# Altium PCB UTAT_data handling.PcbDoc
Units mm, origin at the board's own origin, x right, y up, seen from the top; angles counter-clockwise.
Board outline 152.4 x 101.6 mm, 4 copper layers (Top Layer, +3V3, Ground, Bottom Layer), stack 0.778 mm thick; 168 components, 207 nets, 753 pads, 46 vias.
Unrouted connection lines stored in the file: 367.
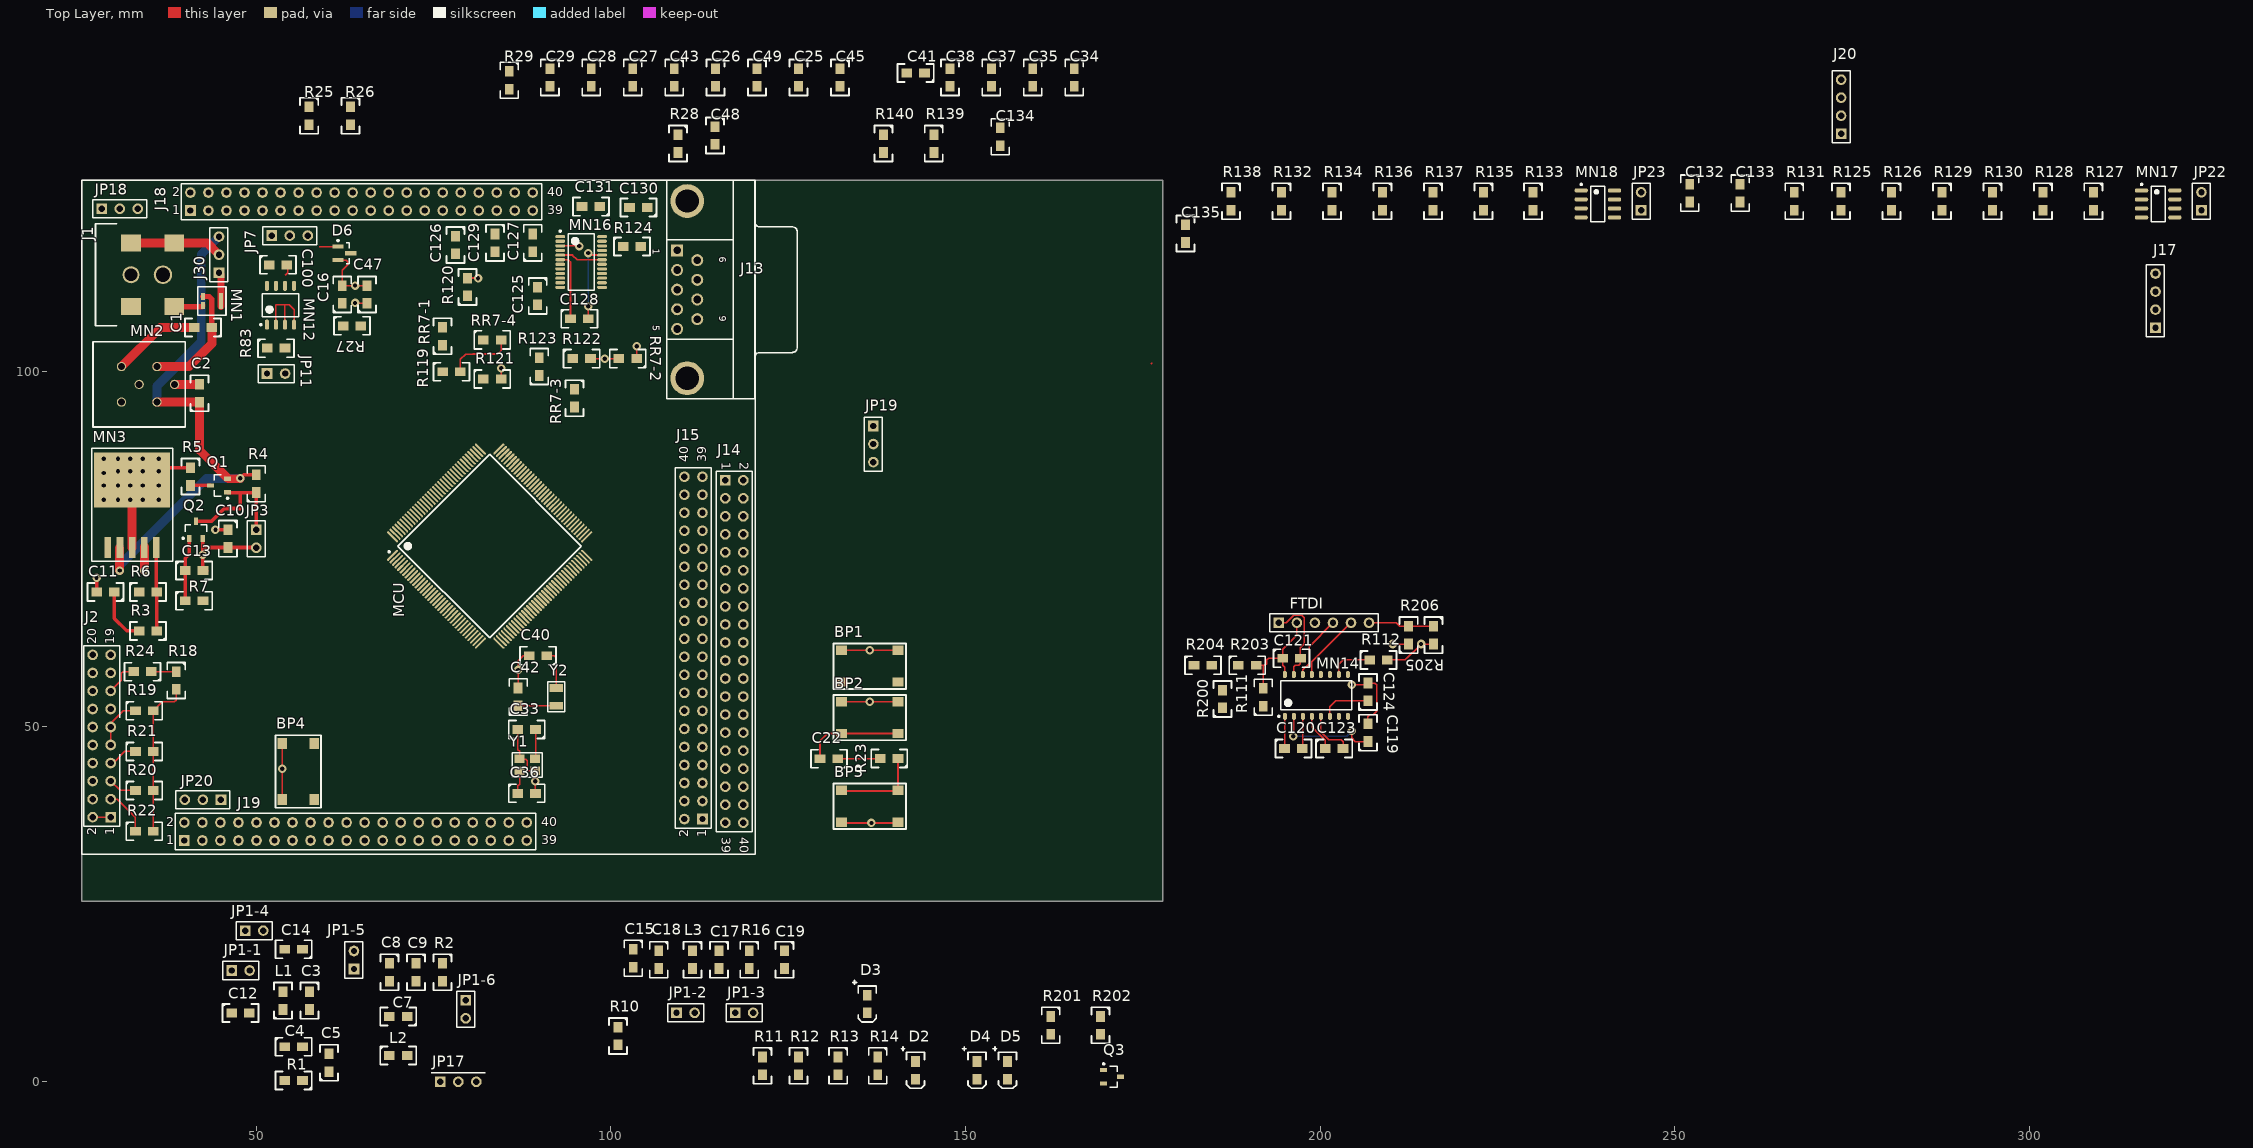
[diagram p0: Top Layer view]
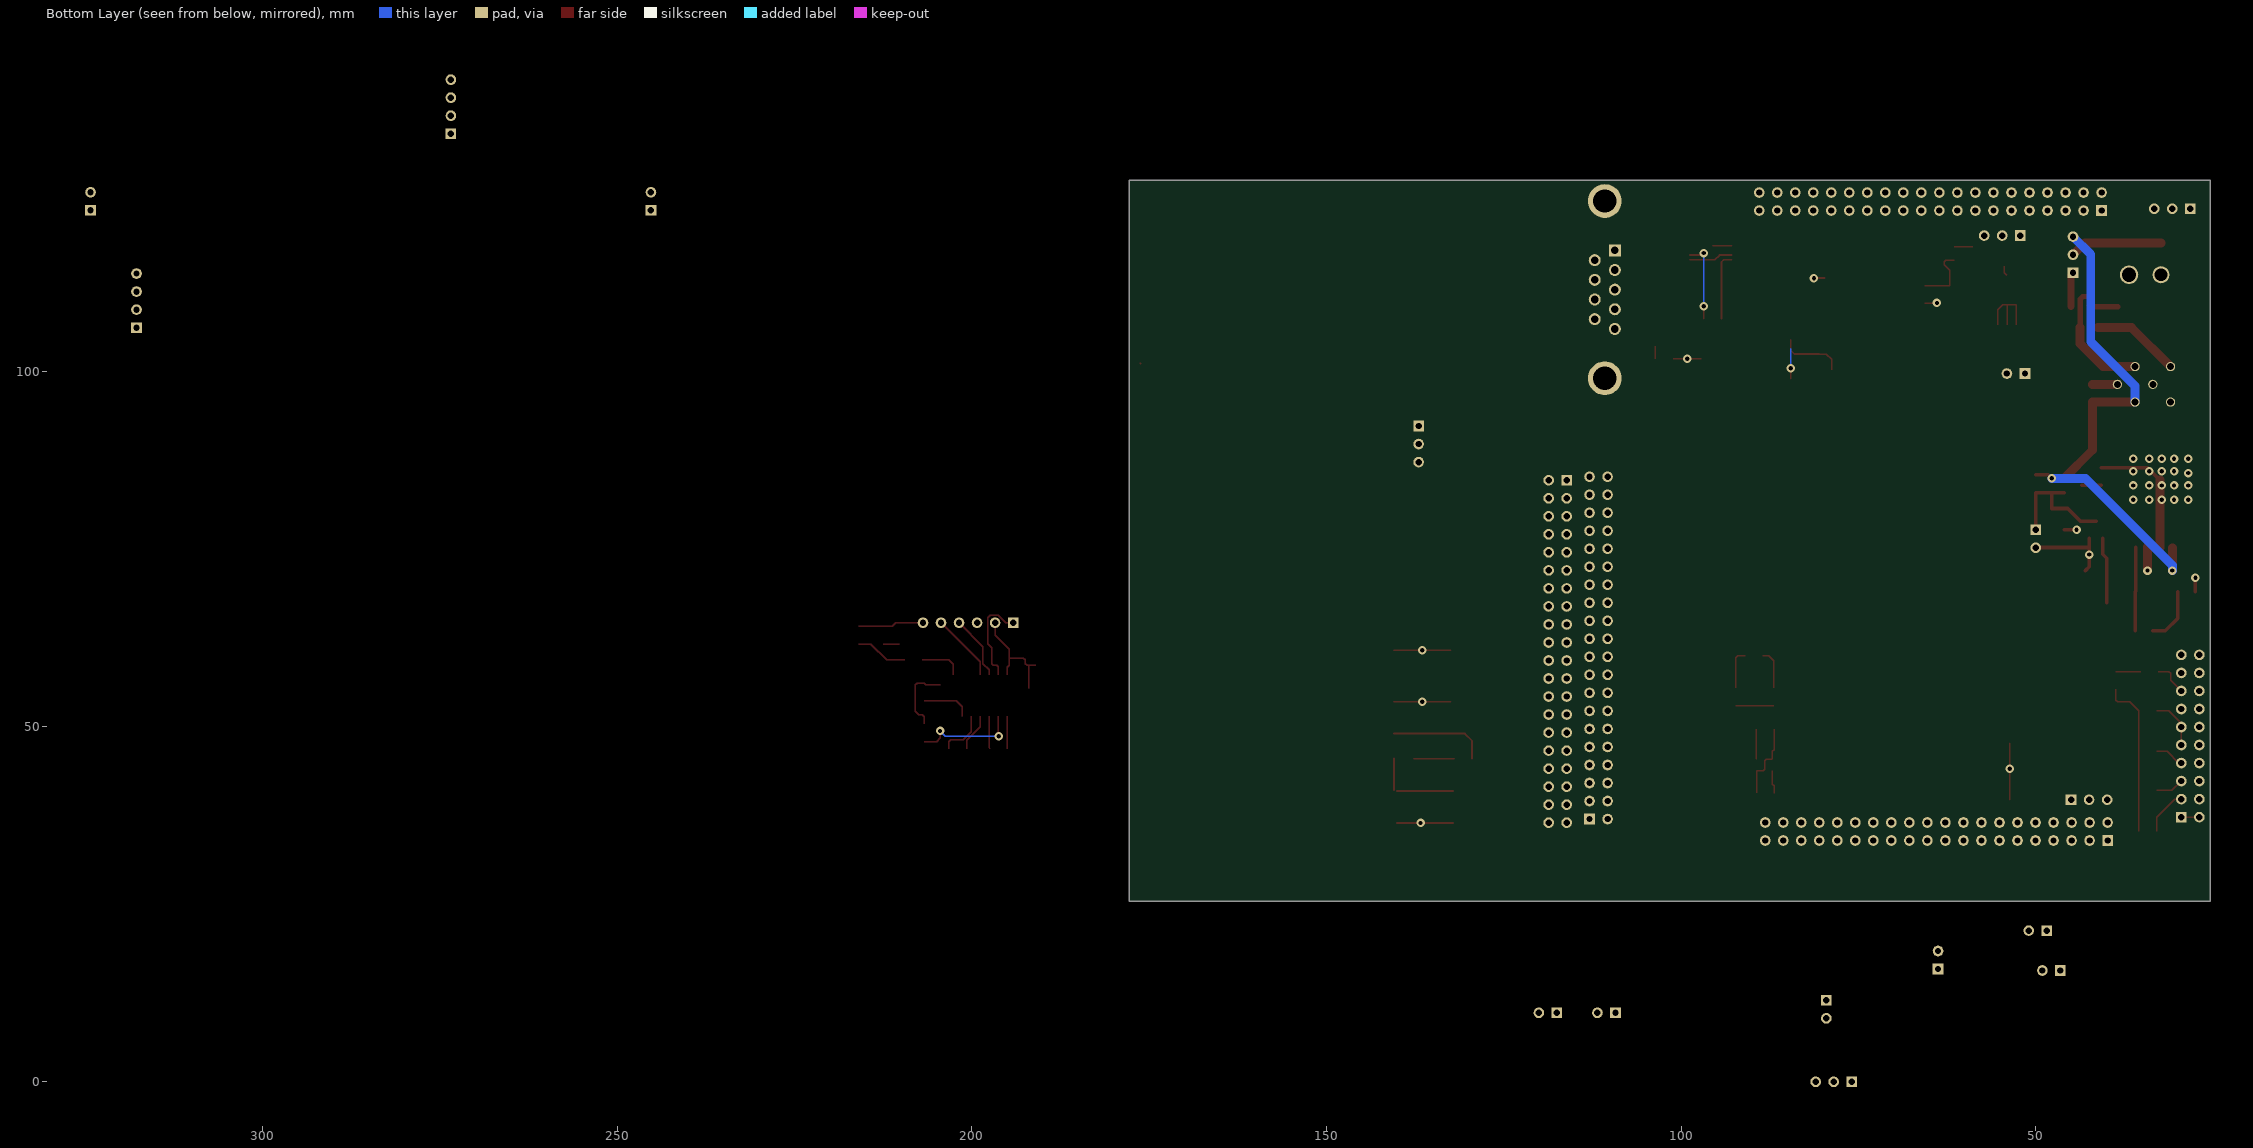
[diagram p1: Bottom Layer view, seen from below]
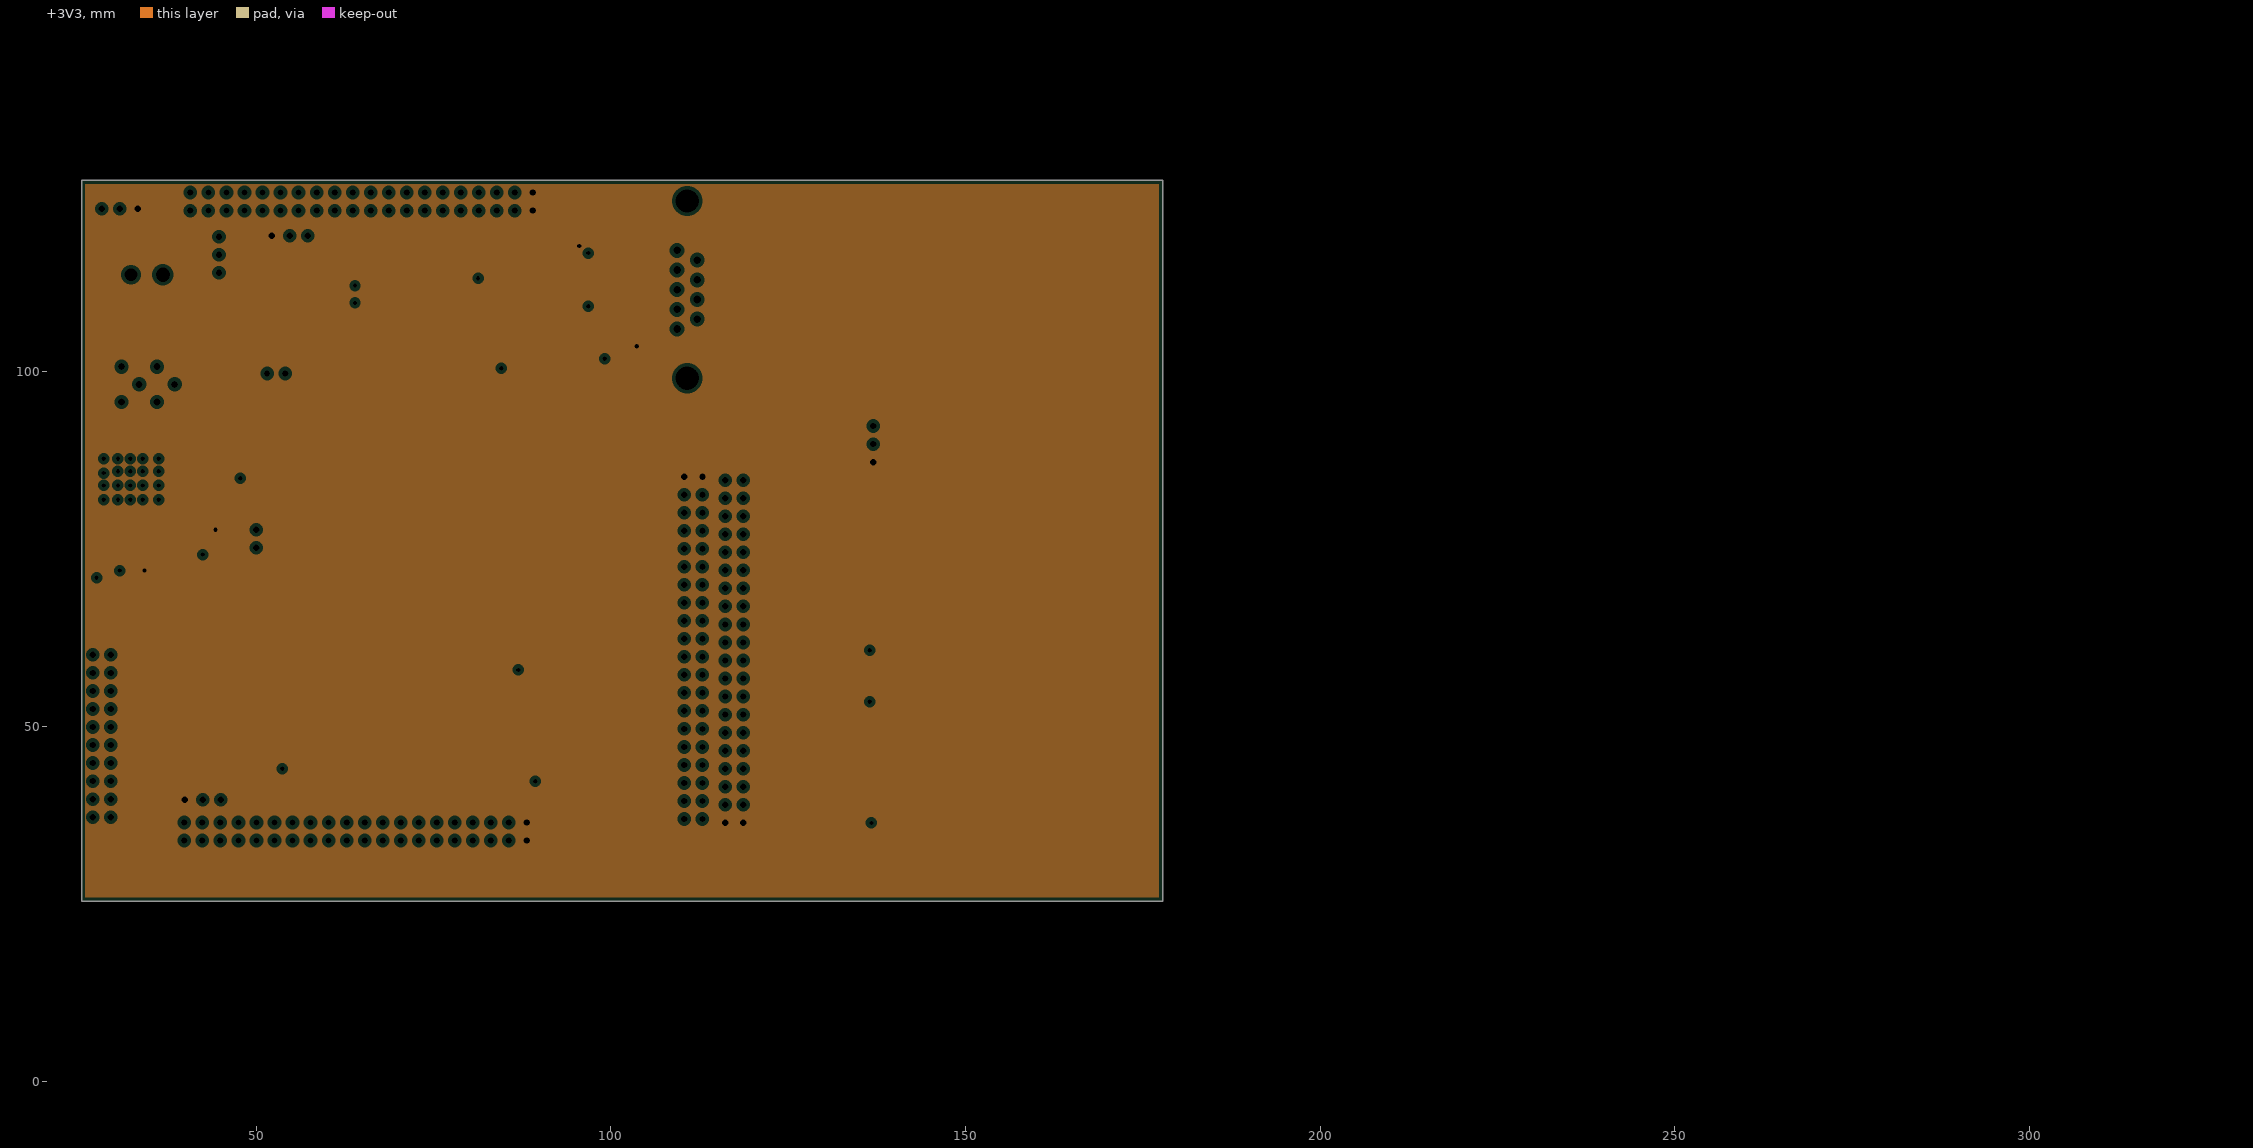
[diagram p2: +3V3, clearances drawn from the general rule]
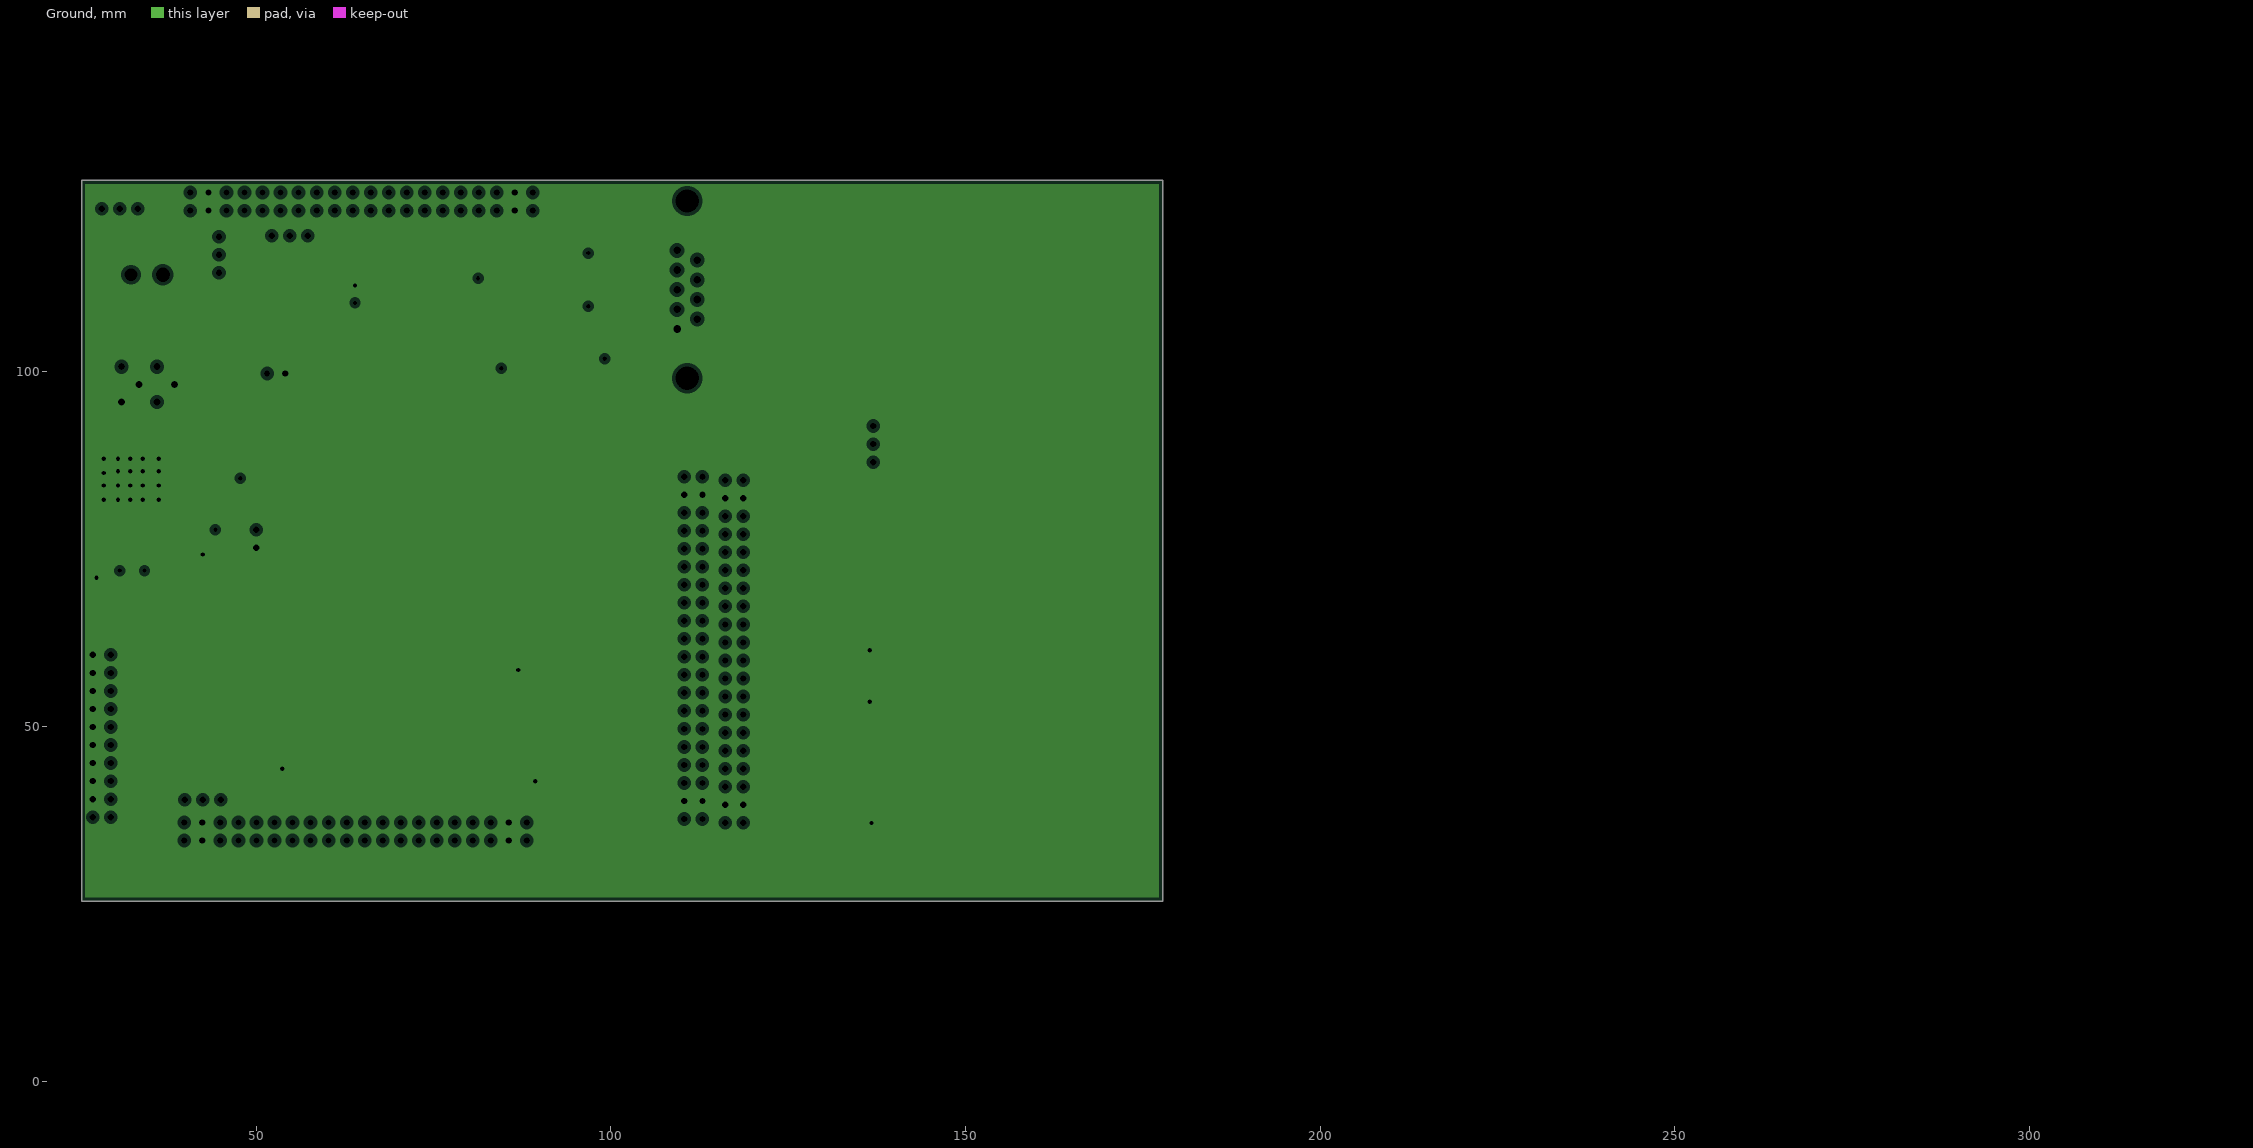
[diagram p3: Ground, clearances drawn from the general rule]

## Layer stack, top to bottom
Top Solder: solder mask 0.0102, Solder Resist, Dk 3.5
Top Layer: signal copper 0.0356
Dielectric 1: core 0.254, FR-4, Dk 4.2
+3V3: plane copper 0.036, net +3V3
Dielectric 3: prepreg 0.127, Dk 4.2
Ground: plane copper 0.036, net GND
Dielectric 2: core 0.254, Dk 4.2
Bottom Layer: signal copper 0.0356
Bottom Solder: solder mask 0.0102, Solder Resist, Dk 3.5

## Board outline
25.4,25.4 177.8,25.4 177.8,127 25.4,127

## Design rules (kind name [scope] priority, off if disabled: settings)
Clearance [All] p1: gap=0.2
ComponentClearance [All] p1: gap=0.25 collisioncheckmode=3 verticalgap=0.254 showdistances=FALSE
PlaneClearance [All] p1: clearance=0.508
PlaneConnect [All] p1: planeconnectstyle=Relief reliefexpansion=0.508 reliefentries=4 reliefconductorwidth=0.254 reliefairgap=0.254
PolygonConnect [All] p1: connectstyle=Relief reliefconductorwidth=0.254 reliefentries=4 polygonreliefangle="90 Angle" airgapwidth=0.254
RoutingVias [All] p1: holewidth=0.6 width=1.2 viastyle="Through Hole" minholewidth=0.6 minwidth=1.2 maxholewidth=0.6 maxwidth=1.2
SolderMaskExpansion [All] p1: expansion=0.102
UnpouredPolygon [All] p1: allowunpoured=FALSE
Width [All] p1: maxlimit=1.25 minlimit=0.2 preferedwidth=0.2
26 further rules are at their usual default settings.

## Classes and differential pairs
component class "U_Other Components": BP1 BP2 BP3 BP4 C1 C2 C3 C4 C5 C7 C8 C9 C10 C11 C12 C13 C14 C15 C17 C18 C19 C22 C100 C119 C120 C121 C123 C124 C125 C126 C127 C128 C129 C130 C131 D2 D3 D4 D5 FTDI J1 J13 J14 J15 J18 J19 J30 JP1-1 JP1-2 JP1-3 JP1-4 JP1-5 JP1-6 JP3 JP11 JP17 JP18 JP19 JP20 L1 L2 L3 MN1 MN2 MN3 MN12 MN14 MN16 Q1 Q2 Q3 R1 R2 R3 R4 R5 R6 R7 R10 R11 R12 R13 R14 R16 R23 R83 R111 R112 R119 R120 R121 R122 R123 R124 R200 R201 R202 R203 R204 R205 R206 RR7-1 RR7-2 RR7-3 RR7-4
net class PD[0..10]: PD0 PD1 PD2 PD3 PD4 PD5 PD6 PD7 PD8 PD9 PD10
net class PC[0..30]: PC0 PC1 PC2 PC3 PC4 PC5 PC6 PC7 PC8 PC9 PC10 PC11 PC12 PC13 PC14 PC15 PC16 PC17 PC18 PC19 PC20 PC21 PC22 PC23 PC24 PC25 PC26 PC27 PC28 PC29 PC30
net class PB[0..31]: PB0 PB1 PB2 PB3 PB4 PB5 PB6 PB7 PB8 PB9 PB10 PB11 PB12 PB13 PB14 PB15 PB16 PB17 PB18 PB19 PB20 PB21 PB22 PB23 PB24 PB25 PB26 PB27 PB28 PB29 PB30 PB31
net class PA[0..29]: PA0 PA1 PA2 PA3 PA4 PA5 PA6 PA7 PA8 PA9 PA10 PA11 PA12 PA13 PA14 PA15 PA16 PA17 PA18 PA19 PA20 PA21 PA22 PA23 PA24 PA25 PA26 PA27 PA28 PA29
component class "U_MCU et al": C16 C25 C26 C27 C28 C29 C33 C34 C35 C36 C37 C38 C40 C41 C42 C43 C45 C47 C48 C49 C132 C133 C134 C135 D6 J2 J17 J20 JP7 JP22 JP23 MCU MN17 MN18 R18 R19 R20 R21 R22 R24 R25 R26 R27 R28 R29 R125 R126 R127 R128 R129 R130 R131 R132 R133 R134 R135 R136 R137 R138 R139 R140 Y1 Y2

## Components (designator, comment, footprint, x,y, rotation, side; value= is the part's Value field where it differs from the comment)
BP1 "PTS645" PTS645 136.5,58.525 r0 top
BP2 "PTS645" PTS645 136.5,51.275 r0 top
BP3 "PTS645" PTS645 136.5,38.775 r180 top
BP4 "PTS645" PTS645 55.95,43.675 r90 top
C1 "Cap Pol3" "0805 Cap" 42.525,106.25 r0 top
C2 "Cap Pol3" "0805 Cap" 42.025,97 r270 top
C3 "Cap Pol3" "0805 Cap" 57.55,11.375 r90 top
C4 "Cap Pol3" "0805 Cap" 55.3,4.875 r180 top
C5 "Cap Pol3" "0805 Cap" 60.3,2.625 r270 top
C7 "Cap Pol3" "0805 Cap" 70.05,9.125 r0 top
C8 "Cap Pol3" "0805 Cap" 68.8,15.375 r90 top
C9 "Cap Pol3" "0805 Cap" 72.55,15.375 r90 top
C10 "Cap Pol3" "0805 Cap" 46.025,76.5 r90 top
C11 "Cap Pol3" "0805 Cap" 28.775,69 r0 top
C12 "Cap Pol3" "0805 Cap" 47.8,9.625 r180 top
C13 "Cap Pol3" "0805 Cap" 41.275,72 r180 top
C14 "Cap Pol3" "0805 Cap" 55.3,18.625 r0 top
C15 "Cap Pol3" "0805 Cap" 103.175,17.35 r90 top
C16 "Cap Pol3" "0805 Cap" 62.15,110.925 r270 top
C17 "Cap Pol3" "0805 Cap" 115.275,17.15 r90 top
C18 "Cap Pol3" "0805 Cap" 106.775,17.15 r90 top
C19 "Cap Pol3" "0805 Cap" 124.475,17.15 r90 top
C22 "Cap Pol3" "0805 Cap" 130.75,45.475 r0 top
C25 "Cap Pol3" "0805 Cap" 126.468,141.498 r90 top
C26 "Cap Pol3" "0805 Cap" 114.784,141.498 r90 top
C27 "Cap Pol3" "0805 Cap" 103.1,141.498 r90 top
C28 "Cap Pol3" "0805 Cap" 97.258,141.498 r90 top
C29 "Cap Pol3" "0805 Cap" 91.416,141.498 r90 top
C33 "0805 Cap" "0805 Cap" 88.15,49.6 r0 top
C34 "Cap Pol3" "0805 Cap" 165.33,141.498 r90 top
C35 "Cap Pol3" "0805 Cap" 159.488,141.498 r90 top
C36 "0805 Cap" "0805 Cap" 88.15,40.6 r180 top
C37 "Cap Pol3" "0805 Cap" 153.646,141.498 r90 top
C38 "Cap Pol3" "0805 Cap" 147.804,141.498 r90 top
C40 "0805 Cap" "0805 Cap" 89.75,60 r0 top
C41 "Cap Pol3" "0805 Cap" 142.978,142.133 r0 top
C42 "0805 Cap" "0805 Cap" 86.95,54.2 r270 top
C43 "Cap Pol3" "0805 Cap" 108.942,141.498 r90 top
C45 "Cap Pol3" "0805 Cap" 132.31,141.498 r90 top
C47 "Cap Pol3" "0805 Cap" 65.65,110.925 r270 top
C48 "Cap Pol3" "0805 Cap" 114.681,133.33 r90 top
C49 "Cap Pol3" "0805 Cap" 120.626,141.498 r90 top
C100 "Cap Pol3" "0805 Cap" 53.1,115.1 r180 top
C119 "Cap Pol3" "0805 Cap" 206.725,49.15 r270 top
C120 "Cap Pol3" "0805 Cap" 196.225,46.9 r180 top
C121 "Cap Pol3" "0805 Cap" 195.975,59.65 r180 top
C123 "Cap Pol3" "0805 Cap" 201.975,46.9 r180 top
C124 "Cap Pol3" "0805 Cap" 206.725,54.9 r270 top
C125 "Cap Pol3" "0805 Cap" 89.7,110.7 r90 top
C126 "Cap Pol3" "0805 Cap" 78.1,117.9 r90 top
C127 "Cap Pol3" "0805 Cap" 89,118.2 r270 top
C128 "Cap Pol3" "0805 Cap" 95.575,107.5 r180 top
C129 "Cap Pol3" "0805 Cap" 83.7,118.2 r90 top
C130 "Cap Pol3" "0805 Cap" 103.9,123.2 r0 top
C131 "Cap Pol3" "0805 Cap" 97.2,123.3 r0 top
C132 "Cap Pol3" "0805 Cap" 252.095,125.202 r90 top
C133 "Cap Pol3" "0805 Cap" 259.207,125.202 r90 top
C134 "Cap Pol3" "0805 Cap" 154.9,133.15 r90 top
C135 "Cap Pol3" "0805 Cap" 181,119.5 r90 top
D2 "Blue" "0805 LED" 142.978,1.556 r90 top
D3 "Amber" "0805 LED" 136.156,10.903 r90 top
D4 "Green" "0805 LED" 151.614,1.556 r90 top
D5 "Red" "0805 LED" 155.932,1.556 r90 top
D6 "LM4040A30IDBZR" TI-DBZ3_N 62.45,116.725 r0 top
FTDI "Header 6" HDR1X6 194.185,64.65 r0 top
J1 "MP179P 2.1mm" "2.1mm Jack" 32.375,113.7 r0 top
J2 "Header 10X2" "HDR2X10 (JTAG)" 29.5,37.25 r90 top
J13 "D Connector 9" DSUB1.385-2H9 120.275,111.6 r270 top
J14 "Header 20X2" HDR2X20 116.15,84.725 r270 top
J15 "Header 20X2" HDR2X20 112.925,36.975 r90 top
J17 "Header 4" HDR1X4 317.75,106.25 r90 top
J18 "Header 20X2" HDR2X20 40.75,122.75 r0 top
J19 "Header 20X2" HDR2X20 39.9,33.95 r0 top
J20 "Header 4" HDR1X4 273.431,133.584 r90 top
J30 "Header 3 (Bypass)" HDR1X3 44.775,114 r90 top
JP1-1 "Header 2" HDR1X2 46.55,15.625 r0 top
JP1-2 "Header 2" HDR1X2 109.275,9.65 r0 top
JP1-3 "Header 2" HDR1X2 117.525,9.65 r0 top
JP1-4 "Header 2" HDR1X2 48.475,21.25 r0 top
JP1-5 "Header 2" HDR1X2 63.8,15.835 r90 top
JP1-6 "Header 2" HDR1X2 79.55,11.415 r270 top
JP3 "Header 2" HDR1X2 50.025,77.75 r270 top
JP7 "Header 3" HDR1X3 52.225,119.225 r0 top
JP11 "Header 2" HDR1X2 51.55,99.775 r0 top
JP17 "Header 3" HDR1X3 75.975,-0.075 r0 top
JP18 "Header 3" HDR1X3 28.25,123 r0 top
JP19 "Header 3" HDR1X3 137.025,92.375 r270 top
JP20 "Header 3" HDR1X3 45.05,39.7 r180 top
JP22 "Header 2" HDR1X2 324.231,122.789 r90 top
JP23 "Header 2" HDR1X2 245.237,122.789 r90 top
L1 "Inductor" "0805 Resistor" 53.8,11.375 r270 top
L2 "Inductor" "0805 Resistor" 70.05,3.625 r180 top
L3 "Inductor" "0805 Resistor" 111.525,17.15 r90 top
MCU "ATSAM3X8EA-AU" LQFP144_M 82.925,75.45 r45 top
MN1 "ZEN056V130A" ZEN056V130A24L 43.775,110 r180 top
MN2 "BNX002-01" BNX002 33.525,98.25 r0 top
MN3 "MIC29152WU" MIC29152WU 32.525,75.25 r0 top
MN12 "AT24C512C" AT24C512C 53.445,109.4 r90 top
MN14 "MAX3232CSE" SOIC127P570X175-16N 199.475,54.4 r90 top
MN16 "ADM3312EARU" TSOP65P640X120-24N 95.825,115.5 r0 top
MN17 "SN65HVD234DR" D8_L 318.135,123.678 r0 top
MN18 "SN65HVD234DR" D8_L 239.141,123.678 r0 top
Q1 "IRLML6401" "3 Pin SOT-23" 44.775,84 r180 top
Q2 "IRLML2502" "3 Pin SOT-23" 41.525,77.75 r90 top
Q3 "IRLML2502" "3 Pin SOT-23" 170.675,0.65 r0 top
R1 "0805 Resistor" "0805 Resistor" 55.3,0.125 r0 top
R2 "0805 Resistor" "0805 Resistor" 76.3,15.375 r90 top
R3 "0805 Resistor" "0805 Resistor" 34.775,63.5 r0 top
R4 "0805 Resistor" "0805 Resistor" 50.025,84.25 r270 top
R5 "0805 Resistor" "0805 Resistor" 40.775,85.25 r90 top
R6 "0805 Resistor" "0805 Resistor" 34.775,69 r180 top
R7 "0805 Resistor" "0805 Resistor" 41.275,67.75 r180 top
R10 "0805 Resistor" "0805 Resistor" 101.025,6.4 r90 top
R11 "0805 Resistor" "0805 Resistor" 121.388,2.191 r90 top
R12 "0805 Resistor" "0805 Resistor" 126.468,2.191 r90 top
R13 "0805 Resistor" "0805 Resistor" 132.056,2.191 r90 top
R14 "0805 Resistor" "0805 Resistor" 137.644,2.191 r90 top
R16 "0805 Resistor" "0805 Resistor" 119.525,17.15 r90 top
R18 "0805 Resistor" "0805 Resistor" 38.75,56.5 r90 top
R19 "0805 Resistor" "0805 Resistor" 34.25,52.25 r180 top
R20 "0805 Resistor" "0805 Resistor" 34.25,41 r180 top
R21 "0805 Resistor" "0805 Resistor" 34.25,46.5 r180 top
R22 "0805 Resistor" "0805 Resistor" 34.25,35.25 r180 top
R23 "0805 Resistor" "0805 Resistor" 139.25,45.525 r0 top
R24 "0805 Resistor" "0805 Resistor" 34,57.75 r0 top
R25 "0805 Resistor" "0805 Resistor" 57.486,136.117 r90 top
R26 "0805 Resistor" "0805 Resistor" 63.328,136.117 r90 top
R27 "0805 Resistor" "0805 Resistor" 63.525,106.5 r180 top
R28 "0805 Resistor" "0805 Resistor" 109.474,132.187 r90 top
R29 "0805 Resistor" "0805 Resistor" 85.701,141.117 r90 top
R83 "0805 Resistor" "0805 Resistor" 52.825,103.35 r180 top
R111 "0805 Resistor" "0805 Resistor" 191.975,54.15 r270 top
R112 "0805 Resistor" "0805 Resistor" 208.225,59.4 r180 top
R119 "0805 Resistor" "0805 Resistor" 77.55,100.025 r180 top
R120 "0805 Resistor" "0805 Resistor" 79.8,111.975 r270 top
R121 "0805 Resistor" "0805 Resistor" 83.3,99.025 r180 top
R122 "0805 Resistor" "0805 Resistor" 95.9,101.875 r180 top
R123 "0805 Resistor" "0805 Resistor" 89.925,100.75 r270 top
R124 "0805 Resistor" "0805 Resistor" 103,117.7 r180 top
R125 "0805 Resistor" "0805 Resistor" 273.431,124.059 r90 top
R126 "0805 Resistor" "0805 Resistor" 280.543,124.059 r90 top
R127 "0805 Resistor" "0805 Resistor" 308.991,124.059 r90 top
R128 "0805 Resistor" "0805 Resistor" 301.879,124.059 r90 top
R129 "0805 Resistor" "0805 Resistor" 287.655,124.059 r90 top
R130 "0805 Resistor" "0805 Resistor" 294.767,124.059 r90 top
R131 "0805 Resistor" "0805 Resistor" 266.827,124.059 r90 top
R132 "0805 Resistor" "0805 Resistor" 194.564,124.059 r90 top
R133 "0805 Resistor" "0805 Resistor" 229.997,124.059 r90 top
R134 "0805 Resistor" "0805 Resistor" 201.676,124.059 r90 top
R135 "0805 Resistor" "0805 Resistor" 223.012,124.059 r90 top
R136 "0805 Resistor" "0805 Resistor" 208.788,124.059 r90 top
R137 "0805 Resistor" "0805 Resistor" 215.9,124.059 r90 top
R138 "0805 Resistor" "0805 Resistor" 187.452,124.059 r90 top
R139 "0805 Resistor" "0805 Resistor" 145.542,132.187 r90 top
R140 "0805 Resistor" "0805 Resistor" 138.43,132.187 r90 top
R200 "0805 Resistor" "0805 Resistor" 186.225,53.9 r270 top
R201 "0805 Resistor" "0805 Resistor" 162.025,7.9 r90 top
R202 "0805 Resistor" "0805 Resistor" 169.025,7.9 r90 top
R203 "0805 Resistor" "0805 Resistor" 189.725,58.65 r180 top
R204 "0805 Resistor" "0805 Resistor" 183.475,58.65 r180 top
R205 "0805 Resistor" "0805 Resistor" 215.975,62.9 r90 top
R206 "0805 Resistor" "0805 Resistor" 212.475,62.9 r270 top
RR7-1 "0805 Resistor" "0805 Resistor" 76.3,105.025 r270 top
RR7-2 "0805 Resistor" "0805 Resistor" 102.4,101.875 r0 top
RR7-3 "0805 Resistor" "0805 Resistor" 94.9,96.3 r90 top
RR7-4 "0805 Resistor" "0805 Resistor" 83.3,104.525 r180 top
Y1 "12MHz" 7V-12.000MAAE-T 88.25,44.6 r0 top
Y2 "XTAL" ABS07 92.35,54.2 r270 top

## Footprints (in the part's own frame and the unit in brackets; to place one, negate y for a bottom-side part, rotate by r counter-clockwise, add the part's x,y. Pads: shape width x height; smd on the part's side, far side on the other; paste and mask are expansions set on the pad)
"2.1mm Jack" [mm]
  rect 2.8x2.4 smd: 1(0,4.5) 1(6.1,4.5) 2(0,-4.5) 3(6.1,-4.5)
  round 2.4 hole 1.8: ""(0,0)
  round 2.6 hole 2: ""(4.5,0)
  silkscreen extent -5,-7.2 -2,7.2
"3 Pin SOT-23" [mm] "SOT23, 3-Leads, Body 2.92x2.37mm, Pitch 0.95mm, IPC Medium Density;"
  rect 1x0.6 smd: 1(-1.2,0.95) 2(-1.2,-0.95) 3(1.2,0)
  silkscreen extent -1.33,-1.5 0.7,1.92, body extent -0.7,-1.52 0.7,1.52, height 1.12
7V-12.000MAAE-T [mm] "Crystal Oscillator. DIgikey Number: 887-1458-1-ND"
  rect 1.4x1.2 smd: 1(-1.1,-0.85) 2(1.1,-0.85) 3(1.1,0.85) 4(-1.1,0.85)
  round 0.6 on Top Overlay: 5(-2.54,-0.889)
  silkscreen extent -2.1,-1.7 2.1,1.7
"0805 Cap" [mm]
  rect 1.5x1.25 smd: 1(1.25,0) 2(-1.25,0)
  silkscreen extent -2.54,-1.27 2.54,1.27, body extent -1,-0.63 1.1,0.63, height 0.9
"0805 LED" [mm] "0805 LED"
  rect 1.5x1.25 smd: 1(1.25,0) 2(-1.25,0)
  silkscreen extent -2.54,-1.27 3.3,2.03, body extent -1,-0.63 1.1,0.63, height 0.9
"0805 Resistor" [mm]
  rect 1.5x1.25 smd: 1(1.25,0) 2(-1.25,0)
  silkscreen extent -2.54,-1.27 2.54,1.27, body extent -1,-0.63 1.1,0.63, height 0.6
ABS07 [mm]
  rect 1.1x1.9 smd: 1(-1.25,0) 2(1.25,0)
  silkscreen extent -2.1,-1.2 2.1,1.2
AT24C512C [mm] "SOIC, 8-Leads, Body 4.92x3.90mm, Pitch 1.27mm, IPC Medium Density"
  oval 1.45x0.6 smd: 1(-2.725,1.905) 2(-2.725,0.635) 3(-2.725,-0.635) 4(-2.725,-1.905) 5(2.725,-1.905) 6(2.725,-0.635) 7(2.725,0.635) 8(2.725,1.905)
  silkscreen extent -2.85,-2.55 1.6,2.88, body extent -2,-2.55 2,2.55, height 1.75
BNX002 [mm]
  round 1.3 hole 1: 1(2.5,2.5) 2(-2.5,2.5) 3(2.5,-2.5) 4(0,0) 5(5,0) 6(-2.5,-2.5)
  silkscreen extent -6.5,-6 6.5,6
D8_L [mm] "SOIC, 8-Leads, Body 4.9x3.9mm, Pitch 1.27mm, IPC High Density"
  oval 1.9x0.6 smd: 1(-2.35,1.905) 2(-2.35,0.635) 3(-2.35,-0.635) 4(-2.35,-1.905) 5(2.35,-1.905) 6(2.35,-0.635) 7(2.35,0.635) 8(2.35,1.905)
  silkscreen extent -2.47,-2.5 1,2.88, body extent -2,-2.5 2,2.5, height 1.75
DSUB1.385-2H9 [mm]
  rect 1.69x1.69 hole 1.09: 1(-5.54,-10.92)
  round 1.69 hole 1.09: 2(-2.77,-10.92) 3(0,-10.92) 4(2.77,-10.92) 5(5.54,-10.92) 6(-4.155,-8.08) 7(-1.385,-8.08) 8(1.385,-8.08) 9(4.155,-8.08)
  round 4.76 hole 3.26: 10(-12.495,-9.5) 11(12.495,-9.5)
  silkscreen extent -15.4,-12.4 15.4,6
HDR1X2 [mm]
  rect 1.5x1.5 hole 0.9: 1(0,0)
  round 1.5 hole 0.9: 2(2.54,0)
  silkscreen extent -1.27,-1.27 3.81,1.27
HDR1X3 [mm] "Connector; Header; 3 Position"
  rect 1.5x1.5 hole 0.9: 1(0,0)
  round 1.5 hole 0.9: 2(2.54,0) 3(5.08,0)
  silkscreen extent -1.27,-1.27 6.35,1.27
HDR1X4 [mm] "Connector; Header; 4 Position"
  rect 1.5x1.5 hole 0.9: 1(0,0)
  round 1.5 hole 0.9: 2(2.54,0) 3(5.08,0) 4(7.62,0)
  silkscreen extent -1.27,-1.27 8.89,1.27
HDR1X6 [mm] "Connector; Header; 6 Position"
  rect 1.5x1.5 hole 0.9: 1(0,0)
  round 1.5 hole 0.9: 2(2.54,0) 3(5.08,0) 4(7.62,0) 5(10.16,0) 6(12.7,0)
  silkscreen extent -1.27,-1.27 13.97,1.27
"HDR2X10 (JTAG)" [mm] "Connector; Header; 10x2 Position"
  rect 1.5x1.5 hole 0.9: 1(0,0)
  round 1.5 hole 0.9: 2(0,2.54) 3(2.54,0) 4(2.54,2.54) 5(5.08,0) 6(5.08,2.54) 7(7.62,0) 8(7.62,2.54) 9(10.16,0) 10(10.16,2.54) 11(12.7,0) 12(12.7,2.54) 13(15.24,0) 14(15.24,2.54) 15(17.78,0) 16(17.78,2.54) 17(20.32,0) 18(20.32,2.54) 19(22.86,0) 20(22.86,2.54)
  silkscreen extent -1.27,-1.27 24.13,3.81
HDR2X20 [mm] "Connector; Header; 20x2 Position"
  rect 1.5x1.5 hole 0.9: 1(0,0)
  round 1.5 hole 0.9: 2(0,2.54) 3(2.54,0) 4(2.54,2.54) 5(5.08,0) 6(5.08,2.54) 7(7.62,0) 8(7.62,2.54) 9(10.16,0) 10(10.16,2.54) 11(12.7,0) 12(12.7,2.54) 13(15.24,0) 14(15.24,2.54) 15(17.78,0) 16(17.78,2.54) 17(20.32,0) 18(20.32,2.54) 19(22.86,0) 20(22.86,2.54) 21(25.4,0) 22(25.4,2.54) 23(27.94,0) 24(27.94,2.54) 25(30.48,0) 26(30.48,2.54) 27(33.02,0) 28(33.02,2.54) 29(35.56,0) 30(35.56,2.54) 31(38.1,0) 32(38.1,2.54) 33(40.64,0) 34(40.64,2.54) 35(43.18,0) 36(43.18,2.54) 37(45.72,0) 38(45.72,2.54) 39(48.26,0) 40(48.26,2.54)
  silkscreen extent -1.27,-1.27 49.53,3.81
LQFP144_M [mm] "Thin QFP, 144-Leads, Body 20x20mm, Pitch 0.5mm, IPC Low Density"
  oval 2.1x0.3 smd: 1(-10.6,8.75) 2(-10.6,8.25) 3(-10.6,7.75) 4(-10.6,7.25) 5(-10.6,6.75) 6(-10.6,6.25) 7(-10.6,5.75) 8(-10.6,5.25) 9(-10.6,4.75) 10(-10.6,4.25) 11(-10.6,3.75) 12(-10.6,3.25) 13(-10.6,2.75) 14(-10.6,2.25) 15(-10.6,1.75) 16(-10.6,1.25) 17(-10.6,0.75) 18(-10.6,0.25) 19(-10.6,-0.25) 20(-10.6,-0.75) 21(-10.6,-1.25) 22(-10.6,-1.75) 23(-10.6,-2.25) 24(-10.6,-2.75) 25(-10.6,-3.25) 26(-10.6,-3.75) 27(-10.6,-4.25) 28(-10.6,-4.75) 29(-10.6,-5.25) 30(-10.6,-5.75) 31(-10.6,-6.25) 32(-10.6,-6.75) 33(-10.6,-7.25) 34(-10.6,-7.75) 35(-10.6,-8.25) 36(-10.6,-8.75) 73(10.6,-8.75) 74(10.6,-8.25) 75(10.6,-7.75) 76(10.6,-7.25) 77(10.6,-6.75) 78(10.6,-6.25) 79(10.6,-5.75) 80(10.6,-5.25) 81(10.6,-4.75) 82(10.6,-4.25) 83(10.6,-3.75) 84(10.6,-3.25) 85(10.6,-2.75) 86(10.6,-2.25) 87(10.6,-1.75) 88(10.6,-1.25) 89(10.6,-0.75) 90(10.6,-0.25) 91(10.6,0.25) 92(10.6,0.75) 93(10.6,1.25) 94(10.6,1.75) 95(10.6,2.25) 96(10.6,2.75) 97(10.6,3.25) 98(10.6,3.75) 99(10.6,4.25) 100(10.6,4.75) 101(10.6,5.25) 102(10.6,5.75) 103(10.6,6.25) 104(10.6,6.75) 105(10.6,7.25) 106(10.6,7.75) 107(10.6,8.25) 108(10.6,8.75)
  oval 0.3x2.1 smd: 37(-8.75,-10.6) 38(-8.25,-10.6) 39(-7.75,-10.6) 40(-7.25,-10.6) 41(-6.75,-10.6) 42(-6.25,-10.6) 43(-5.75,-10.6) 44(-5.25,-10.6) 45(-4.75,-10.6) 46(-4.25,-10.6) 47(-3.75,-10.6) 48(-3.25,-10.6) 49(-2.75,-10.6) 50(-2.25,-10.6) 51(-1.75,-10.6) 52(-1.25,-10.6) 53(-0.75,-10.6) 54(-0.25,-10.6) 55(0.25,-10.6) 56(0.75,-10.6) 57(1.25,-10.6) 58(1.75,-10.6) 59(2.25,-10.6) 60(2.75,-10.6) 61(3.25,-10.6) 62(3.75,-10.6) 63(4.25,-10.6) 64(4.75,-10.6) 65(5.25,-10.6) 66(5.75,-10.6) 67(6.25,-10.6) 68(6.75,-10.6) 69(7.25,-10.6) 70(7.75,-10.6) 71(8.25,-10.6) 72(8.75,-10.6) 109(8.75,10.6) 110(8.25,10.6) 111(7.75,10.6) 112(7.25,10.6) 113(6.75,10.6) 114(6.25,10.6) 115(5.75,10.6) 116(5.25,10.6) 117(4.75,10.6) 118(4.25,10.6) 119(3.75,10.6) 120(3.25,10.6) 121(2.75,10.6) 122(2.25,10.6) 123(1.75,10.6) 124(1.25,10.6) 125(0.75,10.6) 126(0.25,10.6) 127(-0.25,10.6) 128(-0.75,10.6) 129(-1.25,10.6) 130(-1.75,10.6) 131(-2.25,10.6) 132(-2.75,10.6) 133(-3.25,10.6) 134(-3.75,10.6) 135(-4.25,10.6) 136(-4.75,10.6) 137(-5.25,10.6) 138(-5.75,10.6) 139(-6.25,10.6) 140(-6.75,10.6) 141(-7.25,10.6) 142(-7.75,10.6) 143(-8.25,10.6) 144(-8.75,10.6)
  silkscreen extent -10.72,-9.15 9.15,9.57, body extent -10,-10 10,10, height 1.6
MIC29152WU [mm]
  rect 0.93x2.9 smd: 1(-3.404,0) 2(-1.702,0) 3(0,0) 4(1.702,0) 5(3.404,0)
  rect 10.668x7.8 smd: 6(0,9.525)
  silkscreen extent -5.71,-1.91 5.71,13.97
PTS645 [mm]
  rect 1.55x1.33 smd: 1(-3.975,2.25)
  rect 1.55x1.3 smd: 2(3.975,2.25) 3(-3.975,-2.25) 4(3.975,-2.25)
  silkscreen extent -5.1,-3.2 5.1,3.2
SOIC127P570X175-16N [mm] "SOIC, 16-Leads, Body 9.90x4.20mm, Pitch 1.27mm, IPC Medium Density"
  oval 1x0.6 smd: 1(-2.95,4.445) 2(-2.95,3.175) 3(-2.95,1.905) 4(-2.95,0.635) 5(-2.95,-0.635) 6(-2.95,-1.905) 7(-2.95,-3.175) 8(-2.95,-4.445) 9(2.95,-4.445) 10(2.95,-3.175) 11(2.95,-1.905) 12(2.95,-0.635) 13(2.95,0.635) 14(2.95,1.905) 15(2.95,3.175) 16(2.95,4.445)
  silkscreen extent -3.07,-5 2.05,5.42, body extent -2.45,-5 2.45,5, height 1.75
TI-DBZ3_N [mm] "SOT23, 3-Leads, Body 2.92x1.3 mm, Pitch 0.95 mm, IPC Medium Density"
  rect 1.6x0.6 smd: 1(-0.9,0.95) 2(-0.9,-0.95) 3(0.9,0)
  silkscreen extent -1.02,-1.5 0.7,1.92, body extent -0.7,-1.52 0.7,1.52, height 1.12
TSOP65P640X120-24N [mm] "TSOP, 24-Leads, Body 7.80x4.40mm, Pitch 0.65mm, IPC Medium Density"
  oval 1.4x0.45 smd: 1(-2.95,3.575) 2(-2.95,2.925) 3(-2.95,2.275) 4(-2.95,1.625) 5(-2.95,0.975) 6(-2.95,0.325) 7(-2.95,-0.325) 8(-2.95,-0.975) 9(-2.95,-1.625) 10(-2.95,-2.275) 11(-2.95,-2.925) 12(-2.95,-3.575) 13(2.95,-3.575) 14(2.95,-2.925) 15(2.95,-2.275) 16(2.95,-1.625) 17(2.95,-0.975) 18(2.95,-0.325) 19(2.95,0.325) 20(2.95,0.975) 21(2.95,1.625) 22(2.95,2.275) 23(2.95,2.925) 24(2.95,3.575)
  silkscreen extent -3.07,-3.95 1.85,4.47, body extent -2.25,-3.95 2.25,3.95, height 1.2
ZEN056V130A24L [mm]
  rect 0.56x2.21 smd: 1(-1.27,0)
  rect 0.56x0.94 smd: 2(1.27,0.635) 3(1.27,-0.635)
  silkscreen extent -2,-2 2,2

## Part data
BP1 BP2 BP3 BP4: "Digi-Key Part Number CKN9112CT-ND"
C1 C3 C4 C5 C7 C8 C9 C10 C11 C12 C13 C14 C15 C16 C17 C18 C19 C22 C25 C26 C27 C28 C29 C34 C35 C37 C38 C41 C43 C45 C47 C48 C49 C100 C119 C120 C121 C123 C124 C125 C126 C127 C128 C129 C130 C131 C132 C133 C134 C135: "Polarized Capacitor (Surface Mount)"
C2: "Not sure if this one should be 0805?"
C33 C36 C40 C42: library part "0805 MLCC - X7R, 10%", "0805 MLCC - X7R, 10%"
D2: library part LED2, "Typical RED, GREEN, YELLOW, AMBER GaAs LED NO IDEA WHAT IS GOING ON WITH THE FOOTRPINTS"
D3: library part LED2, "Typical RED, GREEN, YELLOW, AMBER GaAs LED. NO IDEA WHAT IS GOING ON WITH THE FOOTPRINTS"
D4: library part LED2, "So I downloaded the footrpint off the net, but it seems to be dodgy, but for some reason the dims don't make sense"
D5: library part LED2, "Typical RED, GREEN, YELLOW, AMBER GaAs LED"
D6: "Precision Micropower Shunt Voltage Reference, 0.1% accuracy, 3 V, 15 ppm / degC, 15 mA, -40 to 85 degC, 3-pin SOT-23 (DBZ), Green (RoHS & no Sb/Br)"
FTDI: "Header, 6-Pin"
J1: "Digi-Key Part Number CP-002AHPJCT-ND"
J2: "Header, 10-Pin, Dual row"
J13: "Receptacle Assembly, 9 Position, Right Angle"
J14 J15 J18 J19: "Header, 20-Pin, Dual row"
J17 J20: "Header, 4-Pin"
J30: library part "Header 3", "Header, 3-Pin"
JP1-1 JP1-2 JP1-3 JP1-4 JP1-5 JP1-6 JP3 JP11 JP22 JP23: "Header, 2-Pin"
JP7: "Header, 3-Pin, fix symbol later"
JP17 JP18 JP19 JP20: "Header, 3-Pin"
L1 L2 L3: "DigiKey: 587-1691-1-ND"
MCU: library part ATSAM3X8E, "ATSAM3X8EA-AU ARM CORTEX M3 Microcontroller"
MN1: library part ZEN0656V130A, "Digi-key number: ZEN056V130A24LSCT-ND"
MN2: "Digikey number: 490-5053-ND"
MN3: "Mircel's 1.5A LDO TO263-5. Digikey Number: 576-3367-5-ND"
MN12: "Digikey Number: AT24C512C-SSHD-TCT-ND"
MN14: "Digikey Number: MAX3232CSE+-ND"
MN16: "Digikey Number: ADM3312EARUZ-ND"
MN17: "3.3V CAN Transceiver with Sleep Mode, 6 mA, -40 to Digi-Key Number 296-27991-1-ND"
MN18: "Digi-Key Number 296-27991-1-ND"
Q1: "Digikey Part Number: IRLML6401PBFCT-ND"
Q2 Q3: "DigiKey Part no: IRLML2502PBFCT-ND"
R1 R2 R3 R4 R5 R6 R7 R10 R11 R12 R13 R14 R16 R18 R19 R20 R21 R22 R23 R24 R25 R26 R27 R28 R29 R83 R119 R125 R126 R127 R128 R129 R130 R131 R132 R133 R134 R135 R136 R137 R138 R139 R140 R200 R201 R202 R203 R204 R205 R206: library part "0805 Thick Film Resistor 1%", "0805 Thick Film Resistor 1%"
R111 R112 R120 R121 R122 R123 R124 RR7-1 RR7-2 RR7-3 RR7-4: library part "0805 Thick Film Resistor 1%_1", "0805 Thick Film Resistor 1%"
Y1: library part "4-Pin Oscillator", "Digi-Key Part Number 887-1458-1-ND"
Y2: "Digikey Number: 535-9544-1-ND"

## Via types
v1: diameter 1.2, hole 0.6, Top Layer to Bottom Layer, 37 vias
v2: diameter 1.2, hole 0.6, Top Layer to Ground, 5 vias
v3: diameter 1.2, hole 0.6, Top Layer to +3V3, 3 vias
v4: diameter 1.2/1.2 (per signal layer), hole 0.6, Top Layer to Bottom Layer, 1 vias

## Nets (pads, with @x,y where several pads share a name; then routed paths per layer and width w, separated by ;. In a path a pad name is that pad's centre, name@x,y a point inside that pad or via, vN(x,y) a via of type N, cw(c..) or ccw(c..) an arc to the next point about the centre after c; other vN are vias at no path point)
3V3: J2.1 J2.2 R18.2 R19.2 R20.2 R21.2 R22.2 | length 24.9
  Top Layer w0.2: J2.2 J2.1 ; R22.2 R20.2 R21.2 R19.2 36.75,53.5 38.5,53.5 38.75,53.75 R18.2
+3V3: C3.1 C8.1 C10.1 C11.1 C100.1 C121.1 C125.1 C126.1 C127.1 C132.1 C133.1 C134.1 C135.1 D2.1 D3.1 D4.1 D5.1 FTDI.2 J14.39 J14.40 J15.39 J15.40 J18.39 J18.40 J19.39 J19.40 JP1-1.2 JP1-5.1 JP7.1 JP17.3 JP18.3 JP19.3 JP20.3 L1.1 L2.1 MN3.4 MN12.8 MN14.16 MN16.3 MN17.3 MN18.3 R3.2 R14.2 R83.2 R111.2 R112.2 R125.2 R132.2 R200.2 R201.2 R202.2 R203.2 R205.2 RR7-1.1 RR7-2.1 RR7-3.1 RR7-4.1 | length 40.9
  Top Layer w0.2: RR7-2.1 v3(103.65,103.625) ; R203.2 191.975,58.65 ; R111.2 191.975,58.65 ; MN14.16 195.03,58.345 194.725,58.65 C121.1 ; FTDI.2 196.725,62.9 194.725,60.9 C121.1 ; R112.2 212.024,59.4 214.225,61.601 v3(214.225,61.65) R205.2 ; 191.975,58.65 192.225,58.65 192.475,58.9 192.475,59.4 192.725,59.65 C121.1
  Top Layer w0.25: MN16.3 v3@95.55,117.775
  Top Layer w0.5: C11.1 30.025,65.25 31.775,63.5 R3.2 ; v1(44.275,77.75) C10.1
  Top Layer w1.25: v1(34.275,72) MN3.4@34.275,75.298
  other v3: 95.575,117.75
+5V: C2.1 J30.3 JP17.1 JP18.1 JP19.1 JP20.1 MN2.3 MN3.2 Q1.2 R4.2 R27.2 | length 77.4
  Top Layer w0.5: Q1.2 47.725,84.95 v1(47.775,85) 48.275,85.5 R4.2
  Top Layer w1.25: v1(30.775,72) MN3.2@30.775,75.202 ; MN2.3 C2.1 42.025,89 46.075,84.95 v1@47.725,84.95
  Bottom Layer w1.25: v1(30.775,72) 30.775,72.75 43.025,85 v1(47.775,85) ; MN2.3 36.025,98 42.275,104.25 42.275,116.58 J30.3
CTS0: MN16.11 R123.2 R201.1
DBGACK: J2.19
DBGRQ: J2.17
EARTH: J13.10 J13.11
FWUP: BP3.3 BP3.4 MCU.53 R23.1 | length 12.4
  Top Layer w0.25: BP3.4@132.15,40.925 BP3.3@140.1,40.925 ; BP3.3@140.5,41.05 R23.1
GND: BP1.1 BP1.2 BP2.1 BP2.2 BP3.1 BP3.2 BP4.1 BP4.2 C2.2 C3.2 C4.2 C5.2 C7.2 C8.2 C9.2 C10.2 C11.2 C12.2 C13.2 C14.2 C15.2 C16.2 C17.2 C18.2 C19.2 C25.2 C26.2 C27.2 C28.2 C29.2 C33.2 C34.2 C35.2 C36.2 C37.2 C38.2 C40.2 C41.2 C42.2 C43.2 C45.2 C47.2 C48.2 C100.2 C119.2 C121.2 C124.2 C125.2 C126.2 C132.2 C133.2 C134.2 C135.2 D6.2 FTDI.1 J2.4 J2.6 J2.8 J2.10 J2.12 J2.14 J2.16 J2.18 J2.20 J13.5 J14.3 J14.4 J14.37 J14.38 J15.3 J15.4 J15.37 J15.38 J17.1 J17.4 J18.3 J18.4 J18.37 J18.38 J19.3 J19.4 J19.37 J19.38 J20.1 J20.4 JP3.2 JP11.2 MCU.12 MCU.33 MCU.44 MCU.54 MCU.58 MCU.106 MCU.126 MN2.4 MN2.5 MN2.6 MN3.3 MN3.6 MN12.2 MN12.3 MN12.4 MN12.7 MN14.15 MN17.2 MN18.2 Q2.2 R5.1 R6.1 R28.1 R29.1 R131.1 R138.1 R204.1 R206.1 Y1.2 Y1.4 | length 130.5
  Top Layer w0.2: MN12.2 52.81,109.45 54.645,109.45 55.35,108.745 MN12.4 ; MN12.3 54.08,109.415 ; 54.145,113.65 54.445,113.95 C100.2@54.445,114.9 ; D6.2 62.7,115.775 62.95,115.525 62.95,115.125 62.15,114.325 C16.2 C47.2 ; C33.2 86.9,46.75 87.15,46.5 Y1.4 ; C42.2 86.95,59.3 87.65,60 C40.2 ; Y1.4@87.2,45.4 88.05,45.4 88.25,45.2 88.25,44 88.45,43.8 89.3,43.8 Y1.2 C36.2@89.35,40.65 ; FTDI.1 195.24,64.65 196.29,65.7 197.425,65.7 197.775,65.35 197.775,61.7 197.225,61.15 C121.2 197.225,58.9 196.975,58.65 196.475,58.65 196.3,58.475 MN14.15 ; v2(204.475,55.9) 206.475,55.9 C124.2 207.725,56.15 207.975,55.9 207.975,52.15 207.475,51.65 206.975,51.65 206.725,51.4 C119.2 ; v2(210.225,61.65) R206.1
  Top Layer w0.25: BP4.1 BP4.2 ; BP3.2@132.15,36.425 BP3.1@140.1,36.425 ; BP2.1 v1(136.5,53.525) BP2.2 ; BP1.1 v1(136.5,60.775) BP1.2
  Top Layer w0.5: C11.2 v1(27.525,71) ; MN3.6 34.25,86.5 R5.1 ; Q2.2 42.475,75.25 ; C13.2@43.025,72 42.475,72.55 42.475,75.25 ; JP3.2@49.985,75.25 C10.2 42.475,75.25
  Top Layer w1.25: MN3.3 MN3.6 ; MN2.5 C2.2
  other v1: 136.75,36.425 53.7,44.05 42.475,74.25 28.525,82 30.525,82 32.275,82 34.025,82 36.275,82 28.525,84 30.525,84 32.275,84 34.025,84 36.275,84 28.525,85.75 30.525,86 32.275,86 34.025,86 36.275,86 28.525,87.75 30.525,87.75 32.275,87.75 34.025,87.75 36.275,87.75
  other v2: 89.35,42.3 86.95,58 63.95,112.175
JTAGSEL: MCU.46 R139.2
NetC1_1: C1.1 MN1.3 MN2.1 | length 16.8
  Top Layer w0.75: MN1.3 43.39,110.635 43.775,110.25 C1.1
  Top Layer w1.25: MN2.1 40.525,100.75 43.775,104 C1.1
NetC1_2: C1.2 J1.3 MN1.2 MN2.2 | length 16.6
  Top Layer w0.75: J1.3 42.34,109.2 MN1.2
  Top Layer w1.25: MN2.2 36.525,106.25 C1.2
NetC4_1: C4.1 JP1-4.2 L1.2 R1.2
NetC5_1: C5.1 R1.1
NetC7_1: C7.1 JP1-6.2 L2.2 R2.2
NetC9_1: C9.1 R2.1
NetC13_1: C13.1 Q2.1 R7.1 | length 9.3
  Top Layer w0.5: R7.1@40.025,67.5 C13.1 40.025,73.75 40.575,74.3 Q2.1
NetC16_1: C16.1 D6.1 JP7.3 R27.1 | length 2.7
  Top Layer w0.2: 58.88,117.675 D6.1
NetC17_1: C17.1 JP1-3.2 L3.2 R16.2
NetC19_1: C19.1 R16.1
NetC48_1: C48.1 MCU.40 R28.2
NetC119_1: C119.1 MN14.2 | length 14.8
  Top Layer w0.2: v1(196.225,48.65) 196.3,48.725 MN14.2 ; v1(204.475,49.4) 204.475,48.4 204.975,47.9 C119.1
  Bottom Layer w0.2: v1(196.225,48.65) 203.725,48.65 v1(204.475,49.4)
NetC120_1: C120.1 MN14.1 | length 4.6
  Top Layer w0.2: C120.1 195.03,46.955 MN14.1
NetC120_2: C120.2 MN14.3 | length 4.6
  Top Layer w0.2: C120.2 197.57,46.995 MN14.3
NetC123_1: C123.1 MN14.4 | length 5.3
  Top Layer w0.2: MN14.4 198.84,49.969 200.725,48.084 C123.1
NetC123_2: C123.2 MN14.5 | length 6.9
  Top Layer w0.2: MN14.5 200.11,49.265 201.225,48.15 202.975,48.15 203.225,47.9 C123.2
NetC124_1: C124.1 MN14.6 | length 7.1
  Top Layer w0.2: MN14.6 201.38,52.805 202.225,53.65 C124.1
NetC127_2: C127.2 MN16.1
NetC128_1: C128.1 MN16.6 | length 9.6
  Top Layer w0.25: MN16.6 94,115.825 94.325,115.5 C128.1
NetC128_2: C128.2 MN16.20 | length 11.7
  Top Layer w0.25: C128.2 v1(96.825,109.25) ; v4(96.825,116.75) 97.075,116.75 97.35,116.475 MN16.20
  Bottom Layer w0.25: v4(96.825,116.75) v1(96.825,109.25) v1@97.075,109.5
NetC129_1: C129.1 MN16.2
NetC129_2: C129.2 MN16.4
NetC130_1: C130.1 MN16.21
NetC130_2: C130.2 MN16.23
NetC131_1: C131.1 MN16.24
NetC131_2: C131.2 MN16.22
NetD2_2: D2.2 R10.2
NetD3_2: D3.2 R11.2
NetD4_2: D4.2 R12.2
NetD5_2: D5.2 R13.2
NetFTDI_3: FTDI.3 R203.1 R204.2
NetFTDI_4: FTDI.4 MN14.14 | length 9.1
  Top Layer w0.2: MN14.14 197.57,57.995 198.44,58.865 198.44,61.285 FTDI.4
NetFTDI_5: FTDI.5 MN14.13 | length 9.6
  Top Layer w0.2: MN14.13 198.84,59.145 FTDI.5
NetFTDI_6: FTDI.6 R205.1 R206.2 | length 9.3
  Top Layer w0.2: FTDI.6 210.725,64.65 211.225,64.15 R206.2 R205.1
NetJ1_1: J1.1 J30.2 | length 13.1
  Top Layer w1.25: J1.1@32.375,118.2 38.475,118.2 43.115,118.2 J30.2
NetJ13_2: J13.2 MN16.15 | length 0
  Top Layer w0.25: 176.225,101.225 176.245,101.205
NetJ13_3: J13.3 MN16.18
NetJ13_7: J13.7 MN16.17
NetJ13_8: J13.8 MN16.14
NetJ14_1: J14.1 J14.2 JP19.2
NetJ15_1: J15.1 J15.2 JP17.2
NetJ17_2: J17.2 JP22.1 MN17.7
NetJ17_3: J17.3 MN17.6 R128.2
NetJ18_1: J18.1 J18.2 JP18.2
NetJ19_1: J19.1 J19.2 JP20.2
NetJ20_2: J20.2 JP23.1 MN18.7
NetJ20_3: J20.3 MN18.6 R135.2
NetJ30_1: J30.1 MN1.1 | length 4.9
  Top Layer w1: J30.1 45.045,113.73 MN1.1@45.045,109.25
NetJP3_1: JP3.1 Q1.1 Q2.3 R4.1 | length 20
  Top Layer w0.5: Q2.3 43.725,78.95 45.525,80.75 47.775,80.75 47.775,83 ; Q1.1@46.025,83 47.775,83 ; Q1.1@46.275,83 47.775,83 ; JP3.1 R4.1 47.775,83
NetJP11_1: JP11.1 MN12.1 R83.1
NetJP22_2: JP22.2 R128.1
NetJP23_2: JP23.2 R135.1
NetMN3_5: MN3.5 R3.1 R6.2 | length 11.7
  Top Layer w0.5: R6.2@35.929,69.096 MN3.5 ; R3.1 R6.2
NetMN14_10: MN14.10 R112.1 | length 6
  Top Layer w0.2: MN14.10 202.65,58.825 203.225,59.4 R112.1
NetMN16_5: MN16.5 MN16.19 R119.2 RR7-4.2 | length 15.4
  Top Layer w0.2: R119.2@78.8,100.275 78.8,101.775 79.55,102.525 80.55,102.525
  Top Layer w0.25: 80.55,102.525 84.05,102.525 84.55,103.025 RR7-4.2 ; MN16.5 94.6,116.475 95.25,115.825 MN16.19
NetMN16_9: MN16.9 RR7-1.2
NetMN16_13: MN16.13 R124.2
NetMN16_16: MN16.16 R124.1
NetMN17_1: MN17.1 R127.2
NetMN17_4: MN17.4 R130.2
NetMN17_5: MN17.5 R129.1
NetMN17_8: MN17.8 R126.2 R131.2
NetMN18_1: MN18.1 R133.2
NetMN18_4: MN18.4 R137.2
NetMN18_5: MN18.5 R136.1
NetMN18_8: MN18.8 R134.2 R138.2
NRST: BP1.3 BP1.4 MCU.69 R18.1 R24.1 | length 3.5
  Top Layer w0.2: R24.1 R18.1
NRSTB: BP2.3 BP2.4 C22.2 MCU.47 | length 13.9
  Top Layer w0.25: C22.2 129.5,48.025 130.5,49.025 BP2.3 BP2.4
NSRST: J2.15 R24.2 | length 4.9
  Top Layer w0.2: J2.15 31,56.53 31,57.5 31.25,57.75 R24.2
NTRST: J2.3 R22.1 | length 6.6
  Top Layer w0.2: J2.3 30.46,39.79 33,37.25 R22.1
P1: C36.1 MCU.36 Y1.1 | length 3.3
  Top Layer w0.2: C36.1 86.9,41.65 87.15,41.9 Y1.1
P2: C33.1 MCU.35 Y1.3 | length 4.2
  Top Layer w0.2: Y1.3 89.4,45.5 C33.1
P8: C45.1 JP1-4.1 MCU.52 R139.1 R140.1
PA0: J15.5 MCU.23 R127.1
PA1: J15.7 MCU.24 R130.1
PA2: J15.9 MCU.85
PA3: J15.11 MCU.84
PA4: J15.13 MCU.83
PA5: J15.15 MCU.25
PA6: J15.17 MCU.82
PA7: J15.19 MCU.26
PA8: J15.21 MCU.27 MN14.12 R200.1
PA9: J15.23 MCU.2 MN14.11 R111.1
PA10: J15.25 MCU.3 R121.1
PA11: J15.27 MCU.4 R120.1
PA12: J15.29 MCU.5 R10.1
PA13: J15.31 MCU.6 R14.1
PA14: J15.33 MCU.7
PA15: J15.35 MCU.8
PA16: J15.6 MCU.78
PA17: J15.8 MCU.9 MN12.5
PA18: J15.10 MCU.70 MN12.6
PA19: J15.12 MCU.71
PA20: J15.14 MCU.72
PA21: J15.16 MCU.107
PA22: J15.18 MCU.81
PA23: J15.20 MCU.80
PA24: J15.22 MCU.79
PA25: J15.24 MCU.108
PA26: J15.26 MCU.109
PA27: J15.28 MCU.110
PA28: J15.30 MCU.111
PA29: J15.32 MCU.112
PB0: J18.5 MCU.113
PB1: J18.7 MCU.114
PB2: J18.9 MCU.115
PB3: J18.11 MCU.118
PB4: J18.13 MCU.119
PB5: J18.15 MCU.120
PB6: J18.17 MCU.121
PB7: J18.19 MCU.122
PB8: J18.21 MCU.123
PB9: J18.23 MCU.127
PB10: J18.25 MCU.128
PB11: J18.27 MCU.129
PB12: J18.29 MCU.86 R11.1
PB13: J18.31 MCU.87 R12.1
PB14: J18.33 MCU.140 R133.1
PB15: J18.35 MCU.76 R137.1
PB16: J18.6 MCU.77
PB17: J18.8 MCU.88
PB18: J18.10 MCU.89
PB19: J18.12 MCU.90
PB20: J18.14 MCU.91 R126.1
PB21: J18.16 MCU.92 R125.1 R129.2
PB22: J18.18 MCU.141
PB23: BP4.3 BP4.4 J18.20 MCU.142
PB24: J18.22 MCU.143
PB25: J18.24 MCU.144 R123.1
PB26: J18.26 MCU.1 R122.1
PB27: J18.28 MCU.68
PB28: J2.9 J2.11 J18.30 MCU.28 R19.1 | length 7.3
  Top Layer w0.2: J2.9 J2.11 29.5,50.5 31.25,52.25 R19.1
PB29: J2.5 J18.32 MCU.29 R20.1 | length 4.1
  Top Layer w0.2: J2.5 30.83,41 R20.1
PB30: J2.13 J18.34 MCU.30
PB31: J2.7 J18.36 MCU.31 R21.1 | length 4.2
  Top Layer w0.2: J2.7 29.87,44.87 31.5,46.5 R21.1
PC0: J14.5 MCU.130
PC1: J14.7 MCU.55 R134.1
PC2: J14.9 MCU.59 R132.1 R136.2
PC3: J14.11 MCU.60 R119.1
PC4: J14.13 MCU.116
PC5: J14.15 MCU.63
PC6: J14.17 MCU.64
PC7: J14.19 MCU.65
PC8: J14.21 MCU.66
PC9: J14.23 MCU.67
PC10: J14.25 MCU.117
PC11: J14.27 MCU.93
PC12: J14.29 MCU.94
PC13: J14.31 MCU.95
PC14: J14.33 MCU.96
PC15: J14.35 MCU.97
PC16: J14.6 MCU.98
PC17: J14.8 MCU.99
PC18: J14.10 MCU.100
PC19: J14.12 MCU.101
PC20: J14.14 MCU.131
PC21: J14.16 MCU.132
PC22: J14.18 MCU.133
PC23: J14.20 MCU.134
PC24: J14.22 MCU.135
PC25: J14.24 MCU.136
PC26: J14.26 MCU.137
PC27: J14.28 MCU.138
PC28: J14.30 MCU.139
PC29: J14.32 MCU.102
PC30: J14.34 MCU.103
PD0: J19.5 MCU.13
PD1: J19.7 MCU.14
PD2: J19.9 MCU.15
PD3: J19.11 MCU.16
PD4: J19.13 MCU.17
PD5: J19.15 MCU.18
PD6: J19.17 MCU.19
PD7: J19.19 MCU.20
PD8: J19.21 MCU.21
PD9: C12.1 C34.1 C35.1 C37.1 C38.1 J19.23 JP1-1.1 MCU.11 MCU.22 MCU.62 MCU.105 MCU.125
PD10: C25.1 C26.1 C27.1 C28.1 C29.1 JP1-2.2 MCU.10 MCU.32 MCU.45 MCU.61 MCU.104 MCU.124
PN1: C41.1 JP1-3.1 MCU.34
PR6: MCU.51 R140.2
PT1: MCU.37 R26.1
PT2: MCU.38 R25.1
PT3: C22.1 C43.1 MCU.41 R23.2 | length 5.7
  Top Layer w0.25: C22.1 R23.2@137.7,45.475
PT5: MCU.50 R7.2
PT14: C49.1 JP1-6.1 MCU.73
PU1: MCU.42 R26.2
PU2: MCU.43 R25.2
PU4: MCU.39
PU5: C40.1 MCU.48 Y2.1 | length 5.7
  Top Layer w0.2: C40.1 92.05,60 92.35,59.7 Y2.1
PU6: C42.1 MCU.49 Y2.2 | length 5.4
  Top Layer w0.2: C42.1 Y2.2
PU7: C15.1 C18.1 JP1-2.1 L3.1 MCU.56
PU8: C14.1 JP1-5.2 MCU.57
PU14: C49.2 MCU.74 R29.2
PU15: C47.1 JP7.2 MCU.75 | length 1.7
  Top Layer w0.2: v1(63.95,109.725) 64,109.675 C47.1
"PWR CN": MN3.1 Q1.3 R5.2 | length 2.8
  Top Layer w0.5: R5.2 Q1.3
RTS0: MN16.8 R122.2 RR7-2.2 | length 4
  Top Layer w0.2: R122.2 RR7-2.2
  other v1: 99.15,101.875
RXD0: MN16.10 R121.2 R202.1 | length 4.3
  Top Layer w0.25: R121.2 v1(84.55,100.525)
  Bottom Layer w0.25: v1(84.55,100.525) 84.55,103.275
TXD0: MN16.7 R120.2 RR7-3.2 | length 1.8
  Top Layer w0.25: R120.2 v1(81.3,113.225)
  Bottom Layer w0.25: v1@81.3,112.975 v1@81.55,112.975
pads on no net: D6.3 J1. J1.2 J13.1 J13.4 J13.6 J13.9 J14.36 J15.34 J15.36 J19.6 J19.8 J19.10 J19.12 J19.14 J19.16 J19.18 J19.20 J19.22 J19.24 J19.25 J19.26 J19.27 J19.28 J19.29 J19.30 J19.31 J19.32 J19.33 J19.34 J19.35 J19.36 MN14.7 MN14.8 MN14.9 MN16.12 Q3.1 Q3.2 Q3.3 R13.1 Y1.5

## Polygon pours and split planes (outlines as drawn)
+3V3 on +3V3 (split plane): 177.29,25.91 25.91,25.91 25.91,126.49 177.29,126.49
GND on Ground (split plane): 177.29,25.91 25.91,25.91 25.91,126.49 177.29,126.49

## Silkscreen, mask and mechanical layers (free items; w line width, h text height)
Top Overlay:
  lines w0.2: 25.4,32 120.4,32 120.4,127 25.4,127 25.4,32

## Text inside footprints (layer, text, board x,y; h text height)
J2: Top Overlay "2" at 27.468,34.71 h1.27 r90; Top Overlay "1" at 30.008,34.71 h1.27 r90; Top Overlay "19" at 30.008,61.634 h1.27 r90; Top Overlay "20" at 27.468,61.634 h1.27 r90
J13: Top Overlay "1" at 105.9,117.39 h1 r270; Top Overlay "5" at 105.9,106.56 h1 r270; Top Overlay "9" at 115.3,107.945 h1 r270; Top Overlay "6" at 115.3,116.255 h1 r270
J14: Top Overlay "39" at 115.642,34.433 h1.27 r270; Top Overlay "40" at 118.182,34.433 h1.27 r270; Top Overlay "2" at 118.182,87.265 h1.27 r270; Top Overlay "1" at 115.642,87.265 h1.27 r270
J15: Top Overlay "1" at 113.433,34.435 h1.27 r90; Top Overlay "2" at 110.893,34.435 h1.27 r90; Top Overlay "40" at 110.893,87.267 h1.27 r90; Top Overlay "39" at 113.433,87.267 h1.27 r90
J18: Top Overlay "1" at 38.21,122.242 h1.27; Top Overlay "2" at 38.21,124.782 h1.27; Top Overlay "40" at 91.042,124.782 h1.27; Top Overlay "39" at 91.042,122.242 h1.27
J19: Top Overlay "1" at 37.36,33.442 h1.27; Top Overlay "2" at 37.36,35.982 h1.27; Top Overlay "40" at 90.192,35.982 h1.27; Top Overlay "39" at 90.192,33.442 h1.27